# EAGLE board Electrical Design File (EAGLE 9.7.0)

Size 189.16 x 135.57 mm. Coordinates in mm from the lower left corner, seen from the top.
Outline: 0,0 189.16,0 189.16,135.57 0,135.57 0,0
Copper layers (1*16): Top 0.035mm / dielectric 1.5mm / Bottom 0.035mm
Design rules "default": minimum track width 6mil, minimum drill 0.35mm, track to track 6mil, track to pad 6mil, pad to pad 6mil, via to via 6mil, smd to smd 6mil, copper to edge 40mil, drill to drill 6mil, minimum pad ring 10mil, minimum via ring 8mil, stop-mask expansion 4mil, vias tented up to drill 0mil, thermal gap 10mil

## Footprints (pad centres in the part's own frame; a part is rotated, then mirrored left to right if it is on the bottom)
BATTERY-GENERIC = drill 1.118 pad 3.15 octagon: + 2.54,0; - -2.54,0
MOTOR = drill 1.118 pad 3.15 octagon: + 2.54,0; - -2.54,0
RESAD1016W63L850D250B = drill 0.83 pad 1.43: 1 -5.08,0; 2 5.08,0
GL5528 = drill 0.8 pad 1.4: 1 -1.702,0; 2 1.702,0
SG90 = drill 1.016 long: 1 -2.54,0; 2 0,0; 3 2.54,0
ARDUINO-UNO-R3-SHIELD = drill 1.016 pad 1.88: 3.3V 24.13,-2.54; 5V 24.13,0; A0 24.13,12.7; A1 24.13,15.24; A2 24.13,17.78; A3 24.13,20.32; A4 24.13,22.86; A5 24.13,25.4; AREF -24.13,-13.97; D2 -24.13,20.32; D3 -24.13,17.78; D4 -24.13,15.24; D5 -24.13,12.7; D6 -24.13,10.16; D7 -24.13,7.62; D8 -24.13,3.81; D9 -24.13,1.27; D10 -24.13,-1.27; D11 -24.13,-3.81; D12 -24.13,-6.35; D13 -24.13,-8.89; GND@0 24.13,2.54; GND@1 24.13,5.08; GND@2 -24.13,-11.43; IOREF 24.13,-7.62; NC 24.13,-10.16; RES 24.13,-5.08; RX -24.13,25.4; SCL -24.13,-19.05; SDA -24.13,-16.51; TX -24.13,22.86; VIN 24.13,7.62
DIP762W53P254L1969H508Q16B = drill 0.743 pad 1.343: 1 -3.81,8.89; 2 -3.81,6.35; 3 -3.81,3.81; 4 -3.81,1.27; 5 -3.81,-1.27; 6 -3.81,-3.81; 7 -3.81,-6.35; 8 -3.81,-8.89; 9 3.81,-8.89; 10 3.81,-6.35; 11 3.81,-3.81; 12 3.81,-1.27; 13 3.81,1.27; 14 3.81,3.81; 15 3.81,6.35; 16 3.81,8.89

## Placement (x,y rotation side)
BAT1  9V  [BATTERY-GENERIC]  10.11,68.63 120 top
M1  MOTOR_HDR  [MOTOR]  46.28,108.58 0 top
R1  10k  [RESAD1016W63L850D250B]  149.77,69.22 90 top
R2  10k  [RESAD1016W63L850D250B]  154.85,69.22 90 top
R3  10k  [RESAD1016W63L850D250B]  137.07,69.22 90 top
R4  10k  [RESAD1016W63L850D250B]  121.83,69.22 90 top
R5  PHOTOCELL_GL5528  [GL5528]  158.77,122.93 0 top
R6  PHOTOCELL_GL5528  [GL5528]  170.07,123.4 0 top
R7  PHOTOCELL_GL5528  [GL5528]  139.71,127.64 0 top
R8  PHOTOCELL_GL5528  [GL5528]  123.47,128.58 0 top
SERVO1  SERVOSG90  [SG90]  182.18,54.17 90 top
U1  ARDUINO-UNO-R3-SHIELD  [ARDUINO-UNO-R3-SHIELD]  120.56,29.84 270 top
U2  L293E  [DIP762W53P254L1969H508Q16B]  46.28,84.81 270 top

## Library data of the parts
BAT1 M1 R1-R8 SERVO1 U1 U2 = Tinkercad

## Nets
BAT1+: BAT1.+ U2.16
BAT1-: BAT1.- U2.8
M1_+: M1.+ U2.6
M1_-: M1.- U2.3
U1_5V: R5.1 R6.1 R7.1 R8.1 SERVO1.2 U1.5V
U1_A0: R1.2 R5.2 U1.A0
U1_A1: R2.2 R6.2 U1.A1
U1_A2: R3.2 R7.2 U1.A2
U1_A3: R4.2 R8.2 U1.A3
U1_D5: U1.D5 U2.1
U1_D6: U1.D6 U2.2
U1_D7: U1.D7 U2.7
U1_D9: SERVO1.3 U1.D9
U1_GND: R1.1 R2.1 R3.1 R4.1 SERVO1.1 U1.GND@0 U1.GND@1 U1.GND@2 U2.13

## Tracks (layer width: path | path; a pad name or v marks a point on that pad's centre or on a via)
BAT1+  (1 unrouted)
BAT1-  (1 unrouted)
M1_+  (1 unrouted)
M1_-  (1 unrouted)
U1_5V  (5 unrouted)
U1_A0  (2 unrouted)
U1_A1  (2 unrouted)
U1_A2  (2 unrouted)
U1_A3  (2 unrouted)
U1_D5  (1 unrouted)
U1_D6  (1 unrouted)
U1_D7  (1 unrouted)
U1_D9  (1 unrouted)
U1_GND  (8 unrouted)